# EAGLE board 502_outin_raspberrypi (EAGLE 7.4.0)
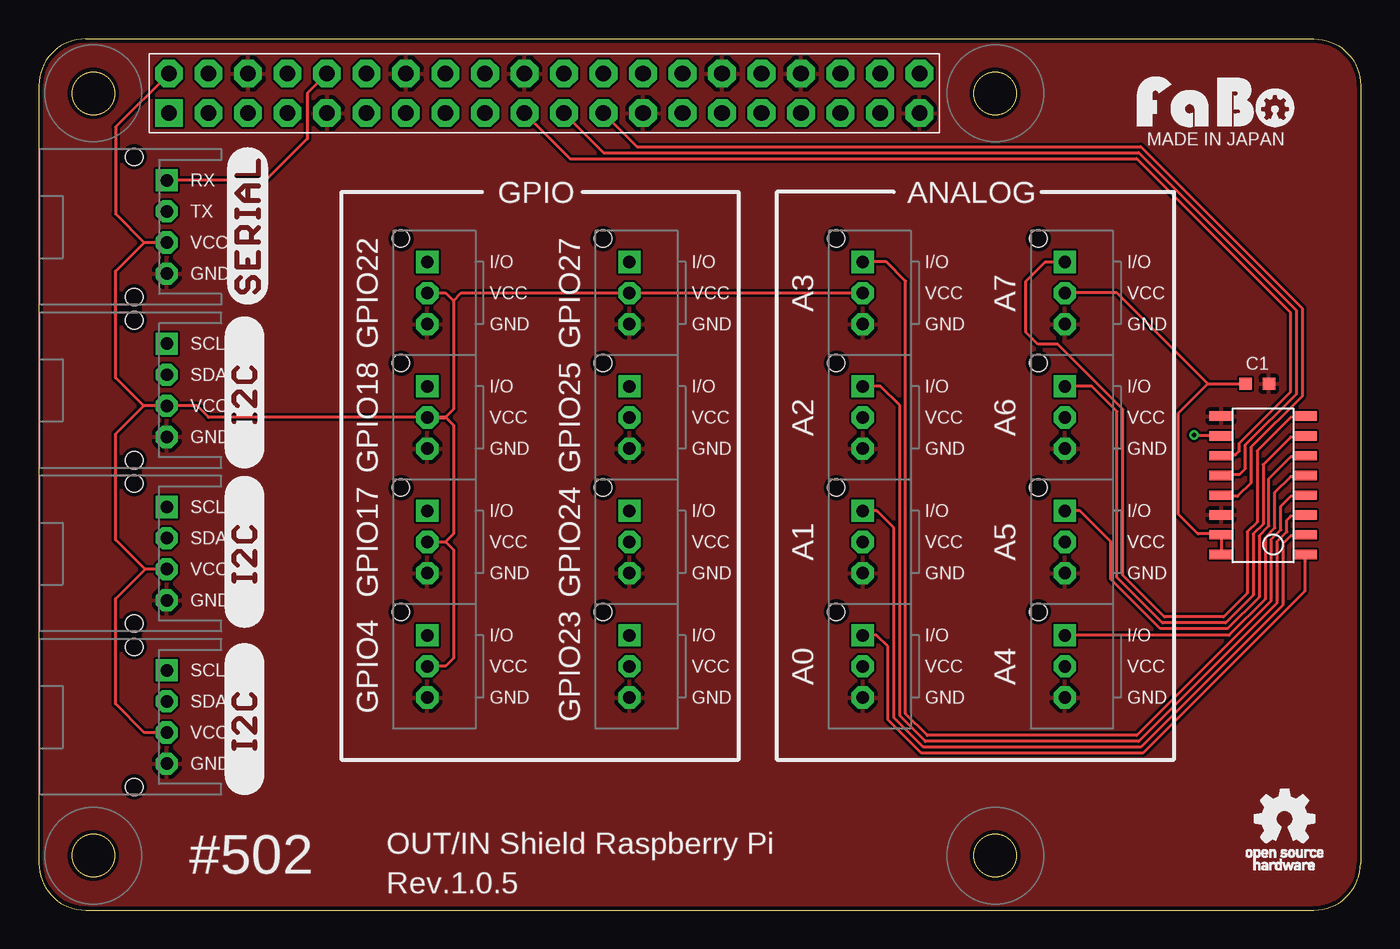
[diagram p0: board, top side]
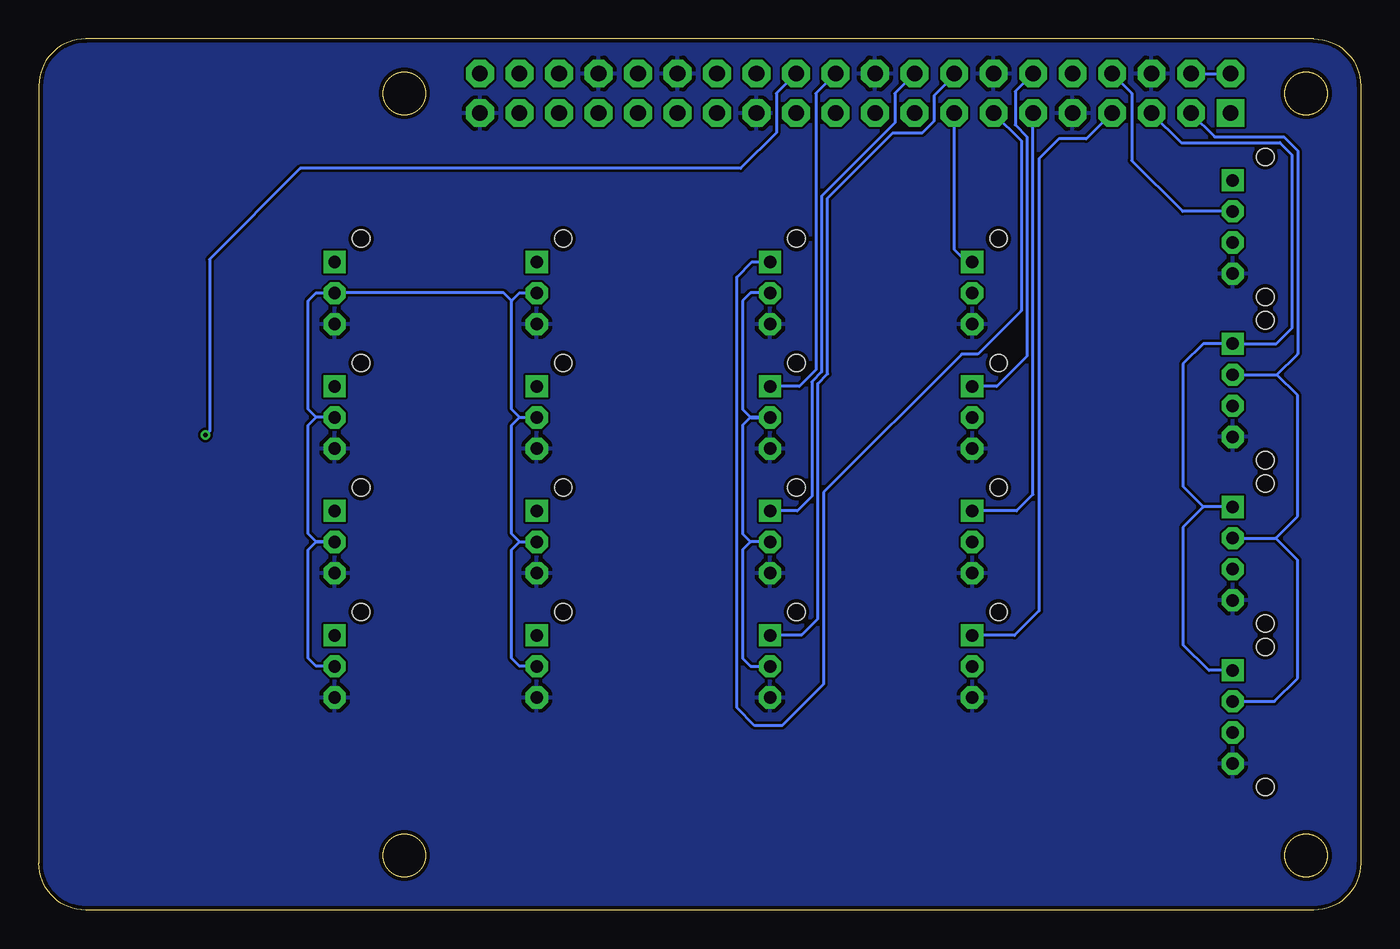
[diagram p1: board, bottom side, seen from below]

Size 85 x 56 mm. Coordinates in mm from the lower left corner, seen from the top.
Copper layers (1*16): Top 0.035mm / dielectric 1.5mm / Bottom 0.035mm
Design rules "Elecrow_2-layer_eagle_rule": minimum track width 6mil, minimum drill 12mil, track to track 6mil, track to pad 6mil, pad to pad 6mil, via to via 6mil, smd to smd 0mil, copper to edge 10mil, drill to drill 10mil, minimum pad ring 10mil, minimum via ring 6mil, stop-mask expansion 2mil, vias tented up to drill 100mil, thermal gap 10mil

## Footprints (pad centres in the part's own frame; a part is rotated, then mirrored left to right if it is on the bottom)
FABO_BRICK_3PIN_B03B-PASK-1 = drill 0.8 pad 1.422 octagon: GND -2,0; VCC 0,0 | drill 0.8 pad 1.422 square: I/O 2,0 | hole 1.1: 3.5,1.7
0603 = smd 0.8 x 0.8: 1 -0.75,0; 2 0.75,0
FABO_BRICK_I2C_S04B-PASK-2 = drill 0.8 pad 1.422 octagon: GND -3,0; SDA 1,0; VCC -1,0 | drill 0.8 pad 1.422 square: SCL 3,0 | hole 1.1: 4.5,2.1; -4.5,2.1
MICROCHIP-MCP3008 = smd 0.6 x 1.5: 1 -4.445,-2.7; 2 -3.175,-2.7; 3 -1.905,-2.7; 4 -0.635,-2.7; 5 0.635,-2.7; 6 1.905,-2.7; 7 3.175,-2.7; 8 4.445,-2.7; 9 4.445,2.7; 10 3.175,2.7; 11 1.905,2.7; 12 0.635,2.7; 13 -0.635,2.7; 14 -1.905,2.7; 15 -3.175,2.7; 16 -4.445,2.7
FABO_BRICK_SERIAL_S04B-PASK-2 = drill 0.8 pad 1.422 octagon: GND -3,0; TX 1,0; VCC -1,0 | drill 0.8 pad 1.422 square: RX 3,0 | hole 1.1: 4.5,2.1; -4.5,2.1
RASPBERRY_PI_B+ = drill 1 pad 1.778 square: 1 0,-2.54 | drill 1 pad 1.778 octagon: 2 0,0; 3 2.54,-2.54; 4 2.54,0; 5 5.08,-2.54; 6 5.08,0; 7 7.62,-2.54; 8 7.62,0; 9 10.16,-2.54; 10 10.16,0; 11 12.7,-2.54; 12 12.7,0; 13 15.24,-2.54; 14 15.24,0; 15 17.78,-2.54; 16 17.78,0; 17 20.32,-2.54; 18 20.32,0; 19 22.86,-2.54; 20 22.86,0; 21 25.4,-2.54; 22 25.4,0; 23 27.94,-2.54; 24 27.94,0; 25 30.48,-2.54; 26 30.48,0; 27 33.02,-2.54; 28 33.02,0; 29 35.56,-2.54; 30 35.56,0; 31 38.1,-2.54; 32 38.1,0; 33 40.64,-2.54; 34 40.64,0; 35 43.18,-2.54; 36 43.18,0; 37 45.72,-2.54; 38 45.72,0; 39 48.26,-2.54; 40 48.26,0

## Placement (x,y rotation side)
A0  [FABO_BRICK_3PIN_B03B-PASK-1]  52.98,15.66 90 top
A1  [FABO_BRICK_3PIN_B03B-PASK-1]  52.98,23.66 90 top
A2  [FABO_BRICK_3PIN_B03B-PASK-1]  52.98,31.66 90 top
A3  [FABO_BRICK_3PIN_B03B-PASK-1]  52.98,39.66 90 top
A4  [FABO_BRICK_3PIN_B03B-PASK-1]  65.98,15.66 90 top
A5  [FABO_BRICK_3PIN_B03B-PASK-1]  65.98,23.66 90 top
A6  [FABO_BRICK_3PIN_B03B-PASK-1]  65.98,31.66 90 top
A7  [FABO_BRICK_3PIN_B03B-PASK-1]  65.98,39.66 90 top
C1  0.1uF  [0603]  78.35,33.83 180 top
GPIO4  [FABO_BRICK_3PIN_B03B-PASK-1]  24.98,15.66 90 top
GPIO17  [FABO_BRICK_3PIN_B03B-PASK-1]  24.98,23.66 90 top
GPIO18  [FABO_BRICK_3PIN_B03B-PASK-1]  24.98,31.66 90 top
GPIO22  [FABO_BRICK_3PIN_B03B-PASK-1]  24.98,39.66 90 top
GPIO23  [FABO_BRICK_3PIN_B03B-PASK-1]  37.98,15.66 90 top
GPIO24  [FABO_BRICK_3PIN_B03B-PASK-1]  37.98,23.66 90 top
GPIO25  [FABO_BRICK_3PIN_B03B-PASK-1]  37.98,31.66 90 top
GPIO27  [FABO_BRICK_3PIN_B03B-PASK-1]  37.98,39.66 90 top
I2C1  [FABO_BRICK_I2C_S04B-PASK-2]  8.23,33.41 90 top
I2C2  [FABO_BRICK_I2C_S04B-PASK-2]  8.23,22.91 90 top
I2C3  [FABO_BRICK_I2C_S04B-PASK-2]  8.23,12.41 90 top
IC1  [MICROCHIP-MCP3008]  78.73,27.3 90 top
SERIAL  [FABO_BRICK_SERIAL_S04B-PASK-2]  8.23,43.91 90 top
U1  [RASPBERRY_PI_B+]  8.37,53.77 0 top
U$2  [LOGO_SILK_I2C]  14.48,18.16 90 top
U$3  [LOGO_SILK_SERIAL2]  14.73,38.91 90 top
U$4  [LOGO_OSHW_T_MS]  80.12,5.83 0 top
U$5  [LOGO_SILK_I2C]  14.48,7.41 90 top
U$6  [LOGO_SILK_I2C]  14.48,28.41 90 top
U$14  [LOGO_FABO_MS]  75.68,49.96 0 top

## Library data of the parts
A0 A1-A7 GPIO4 GPIO17 GPIO18 GPIO22-GPIO25 GPIO27 I2C1-I2C3 SERIAL = FaBo-Template
C1 = FaBo-Capacitor
IC1 = FaBo-ADC
U1 = FaBo-Boards
U$2-U$6 U$14 = FaBo-etc

## Nets
5V: A0.VCC A1.VCC A2.VCC A3.VCC A4.VCC A5.VCC A6.VCC A7.VCC C1.2 GPIO4.VCC GPIO17.VCC GPIO18.VCC GPIO22.VCC GPIO23.VCC GPIO24.VCC GPIO25.VCC GPIO27.VCC I2C1.VCC I2C2.VCC I2C3.VCC IC1.15 IC1.16 SERIAL.VCC U1.2 U1.4
CE0: IC1.10 U1.24
CH0: A0.I/O IC1.1
CH1: A1.I/O IC1.2
CH2: A2.I/O IC1.3
CH3: A3.I/O IC1.4
CH4: A4.I/O IC1.5
CH5: A5.I/O IC1.6
CH6: A6.I/O IC1.7
CH7: A7.I/O IC1.8
GND: A0.GND A1.GND A2.GND A3.GND A4.GND A5.GND A6.GND A7.GND C1.1 GPIO4.GND GPIO17.GND GPIO18.GND GPIO22.GND GPIO23.GND GPIO24.GND GPIO25.GND GPIO27.GND I2C1.GND I2C2.GND I2C3.GND IC1.9 IC1.14 SERIAL.GND U1.6 U1.9 U1.14 U1.20 U1.25 U1.30 U1.34 U1.39
GPIO4: GPIO4.I/O U1.7
GPIO17: GPIO17.I/O U1.11
GPIO18: GPIO18.I/O U1.12
GPIO22: GPIO22.I/O U1.15
GPIO23: GPIO23.I/O U1.16
GPIO24: GPIO24.I/O U1.18
GPIO25: GPIO25.I/O U1.22
GPIO27: GPIO27.I/O U1.13
MISO: IC1.12 U1.21
MOSI: IC1.11 U1.19
RX: SERIAL.RX U1.10
SCL: I2C1.SCL I2C2.SCL I2C3.SCL U1.5
SCLK: IC1.13 U1.23
SDA: I2C1.SDA I2C2.SDA I2C3.SDA U1.3
TX: SERIAL.TX U1.8

## Tracks (layer width: path | path; a pad name or v marks a point on that pad's centre or on a via)
5V
  Top 0.203: A7.VCC 65.99,39.67 69.33,39.67 75.17,33.83 | IC1.16 IC1.15 75.73,24.13 75.68,24.18 74.54,24.18 73.27,25.45 73.27,31.93 75.17,33.83 | A3.VCC GPIO27.VCC 37.97,39.67 27.17,39.67 26.66,39.17 | GPIO22.VCC 24.99,39.66 25.01,39.67 26.15,39.67 26.66,39.17 | 26.66,39.17 26.66,32.18 26.15,31.67 | 26.15,31.67 24.99,31.67 GPIO18.VCC | GPIO18.VCC 26.14,31.66 26.15,31.67 | 26.15,31.67 26.66,31.16 26.66,24.18 26.15,23.67 | GPIO17.VCC 26.15,23.67 | 26.15,23.67 26.66,23.16 26.66,16.18 26.15,15.67 GPIO4.VCC | U1.2 4.94,50.34 4.94,44.75 6.78,42.91 | 75.17,33.83 C1.2 | SERIAL.VCC 6.78,42.91 | 6.74,32.41 I2C1.VCC 10.17,32.41 10.91,31.67 24.97,31.67 GPIO18.VCC | 6.74,32.41 4.94,34.21 4.94,41.07 6.78,42.91 | I2C2.VCC 6.83,21.91 | 6.83,21.91 4.94,23.8 4.94,30.61 6.74,32.41 | I2C3.VCC 6.79,11.41 4.94,13.26 4.94,20.02 6.83,21.91
  Bottom 0.203: A4.VCC 67.17,15.67 67.68,16.18 67.68,23.16 67.17,23.67 | 67.17,23.67 A5.VCC 67.16,23.66 67.17,23.67 | 67.17,23.67 67.68,24.18 67.68,31.16 67.17,31.67 | A6.VCC 65.99,31.67 67.17,31.67 | 67.17,31.67 67.68,32.18 67.68,39.17 67.17,39.67 65.99,39.67 A7.VCC 65.97,39.67 55.11,39.67 54.6,39.17 | GPIO27.VCC 37.99,39.67 39.23,39.67 39.74,39.17 39.74,32.18 39.23,31.67 | 39.23,31.67 39.22,31.66 GPIO25.VCC 37.99,31.67 39.23,31.67 | 39.23,31.67 39.74,31.16 39.74,24.18 39.23,23.67 | GPIO24.VCC 37.99,23.67 39.23,23.67 | 39.23,23.67 39.74,23.16 39.74,16.18 39.23,15.67 GPIO23.VCC | A0.VCC 54.09,15.67 54.6,16.18 54.6,23.16 54.09,23.67 | 54.09,23.67 52.99,23.67 A1.VCC | A2.VCC 54.08,31.66 54.09,31.67 | 54.6,39.17 54.09,39.67 52.99,39.67 A3.VCC | 54.09,23.67 54.6,24.18 54.6,31.16 54.09,31.67 | 54.09,31.67 54.6,32.18 54.6,39.17 | U1.4 U1.2
CE0  (via drill 0.3)
  Top 0.203: 75.98,30.53 IC1.10 75.48,30.48 75.43,30.53 v74.28,30.53
  Bottom 0.203: U1.24 37.58,52.5 37.58,49.96 39.87,47.67 68.19,47.67 74.03,41.83 74.03,30.78 v74.28,30.53
CH0
  Top 0.203: IC1.1 81.4,22.82 81.4,20.5 70.98,10.08 56.76,10.08 54.6,12.24 54.6,16.94 53.88,17.66 A0.I/O
CH1
  Top 0.203: IC1.2 81.36,24.05 80.51,24.05 80,23.54 80,19.61 70.85,10.46 56.88,10.46 54.98,12.37 54.98,24.56 53.88,25.66 A1.I/O
CH2
  Top 0.203: IC1.3 81.36,25.32 80.51,25.32 80.25,25.07 80.25,24.31 79.62,23.67 79.62,19.73 70.73,10.84 57.01,10.84 55.36,12.5 55.36,32.43 54.13,33.66 A2.I/O
CH3
  Top 0.203: IC1.4 81.36,26.59 80.51,26.59 79.87,25.96 79.87,24.43 79.24,23.8 79.24,19.86 70.6,11.23 57.14,11.23 55.74,12.62 55.74,40.44 54.52,41.66 A3.I/O
CH4
  Top 0.203: IC1.5 81.36,27.86 80.51,27.86 79.49,26.85 79.49,24.56 78.86,23.93 78.86,19.99 76.53,17.66 A4.I/O
CH5
  Top 0.203: IC1.6 81.36,29.13 80.51,29.13 79.11,27.74 79.11,24.69 78.47,24.05 78.47,20.12 76.44,18.08 72.12,18.08 68.95,21.26 68.95,23.67 66.96,25.66 A5.I/O
CH6
  Top 0.203: IC1.7 80.96,30.48 80.89,30.4 80.51,30.4 78.73,28.62 78.73,24.81 78.09,24.18 78.09,20.24 76.31,18.46 72.25,18.46 69.33,21.39 69.33,32.05 67.72,33.66 A6.I/O
CH7
  Top 0.203: IC1.8 80.96,31.75 80.89,31.67 80.51,31.67 78.35,29.51 78.35,24.94 77.71,24.31 77.71,20.37 76.19,18.85 72.38,18.85 69.71,21.51 69.71,32.18 65.52,36.37 64.25,36.37 63.49,37.13 63.49,40.44 64.71,41.66 A7.I/O
GND
  pour Bottom: -1.79,-2.11 87.11,-2.11 87.11,57.58 -1.79,57.58
  pour Top: -1.79,-2.11 87.11,-2.11 87.11,57.58 -1.79,57.58
GPIO4
  Bottom 0.203: U1.7 17.64,49.58 19.42,49.58 20.69,48.31 20.69,19.23 22.25,17.66 GPIO4.I/O
GPIO17
  Bottom 0.203: U1.11 21.07,26.72 22.13,25.66 GPIO17.I/O
GPIO18
  Bottom 0.203: U1.12 22.21,52.63 22.21,50.47 21.45,49.71 21.45,35.61 23.4,33.66 GPIO18.I/O
GPIO22
  Bottom 0.203: U1.15 26.15,42.47 25.34,41.66 GPIO22.I/O
GPIO23
  Bottom 0.203: GPIO23.I/O 37.94,17.7 35.93,17.7 34.91,18.72 34.91,33.83 34.28,34.47 34.28,45.77 30.09,49.96 28.18,49.96 27.42,50.72 27.42,52.37 26.15,53.64 U1.16
GPIO24
  Bottom 0.203: U1.18 29.96,52.5 29.96,50.6 34.66,45.9 34.66,34.59 35.29,33.96 35.29,26.59 36.23,25.66 GPIO24.I/O
GPIO25
  Bottom 0.203: U1.22 35.04,52.5 35.04,34.72 36.1,33.66 GPIO25.I/O
GPIO27
  Bottom 0.203: U1.13 21.83,49.45 21.83,38.53 24.63,35.74 25.64,35.74 34.53,26.85 34.53,14.53 37.2,11.86 38.98,11.86 40.12,13 40.12,40.69 39.15,41.66 GPIO27.I/O
MISO
  Top 0.203: 75.98,27.99 IC1.12 76.64,27.94 76.7,27.99 77.2,27.99 77.59,28.37 77.59,29.89 80.89,33.2 80.89,38.53 70.73,48.69 36.31,48.69 U1.21
MOSI
  Top 0.203: 75.98,29.26 IC1.11 76.77,29.21 76.82,29.26 76.95,29.26 77.2,29.51 77.2,30.02 80.51,33.32 80.51,38.4 70.6,48.31 34.15,48.31 U1.19
RX
  Top 0.203: U1.10 17.26,52.5 17.26,49.58 14.59,46.91 SERIAL.RX
SCL
  Bottom 0.203: U1.5 11.54,49.33 5.19,49.33 4.43,48.56 4.43,37.39 5.41,36.41 I2C1.SCL 10.11,36.41 11.42,35.1 11.42,27.23 10.1,25.91 | I2C3.SCL 9.76,15.41 11.42,17.07 11.42,24.59 10.1,25.91 | I2C2.SCL 10.1,25.91
SCLK
  Top 0.203: U1.23 38.47,49.07 70.85,49.07 81.27,38.66 81.27,33.07 77.97,29.77 77.97,27.48 77.08,26.59 76.7,26.59 76.62,26.67 IC1.13
SDA
  Bottom 0.203: U1.3 9.39,49.71 4.94,49.71 4.05,48.82 4.05,35.74 5.38,34.41 | I2C1.SDA 5.38,34.41 | I2C2.SDA 5.46,23.91 | 5.46,23.91 4.05,25.32 4.05,33.08 5.38,34.41 | I2C3.SDA 5.55,13.41 4.05,14.91 4.05,22.5 5.46,23.91
TX
  Bottom 0.203: U1.8 14.72,52.5 14.72,48.18 11.45,44.91 SERIAL.TX

## Text on the board
tPlace: MADE IN JAPAN | RX | GPIO | ANALOG | TX | VCC | GND | I/O | I/O | I/O | I/O | VCC | VCC | VCC | VCC | GND | GND | GND | GND | SCL | SDA | I/O | I/O | I/O | I/O | VCC | VCC | VCC | VCC | VCC | GND | GND | GND | GND | GND | SCL | I/O | I/O | I/O | I/O | SDA | VCC | VCC | VCC | VCC | VCC | GND | GND | GND | GND | GND | I/O | I/O | I/O | I/O | SCL | VCC | VCC | VCC | VCC | SDA | GND | GND | GND | GND | VCC | GND | OUT/IN Shield Raspberry Pi | #502 | Rev.1.0.5